# EAGLE board MovimientoC (EAGLE 7.6.0)
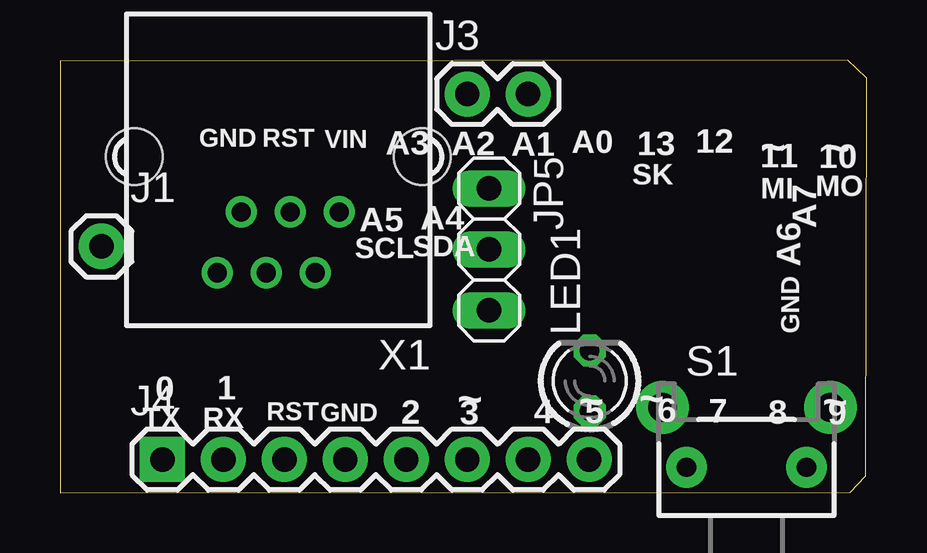
[diagram p0: board, top side]
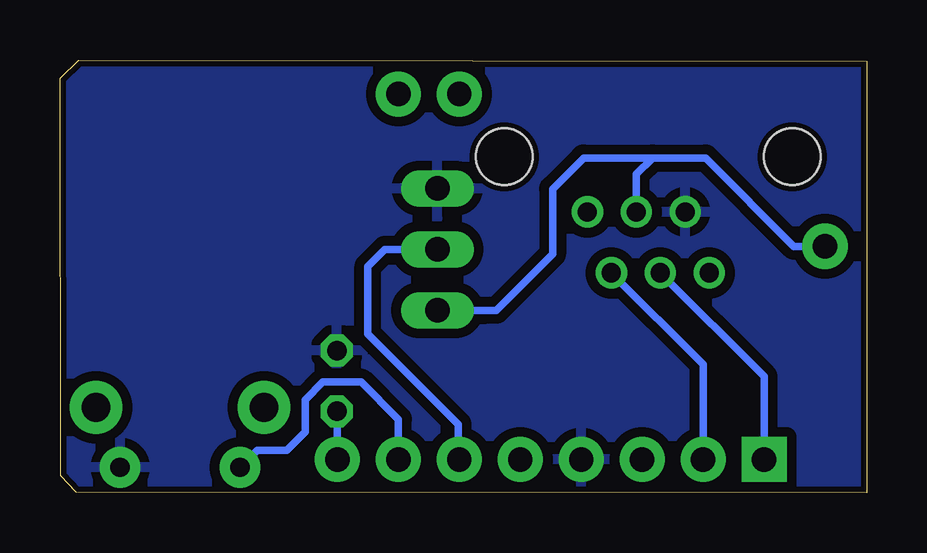
[diagram p1: board, bottom side, seen from below]

Size 33.6 x 18.06 mm. Coordinates in mm from the lower left corner, seen from the top.
Outline: 0,0 32.92,0.02 33.58,0.71 33.6,17.3 32.82,18.06 0,18.01 0,0
Copper layers (1*16): Top 0.035mm / dielectric 1.5mm / Bottom 0.035mm
Design rules "ITEADstudio_DRC *": minimum track width 6mil, minimum drill 12mil, track to track 16mil, track to pad 12mil, pad to pad 6mil, via to via 6mil, smd to smd 0mil, copper to edge 10mil, drill to drill 10mil, minimum pad ring 10mil, minimum via ring 6mil, stop-mask expansion 2mil, vias tented up to drill 100mil, thermal gap 15mil
Net classes: 1 power: width 0.381 mm, clearance 0.254 mm

## Footprints (pad centres in the part's own frame; a part is rotated, then mirrored left to right if it is on the bottom)
1X01 = drill 1.016 pad 1.88: 1 0,0
1X02 = drill 1.016 pad 1.88: 1 0,0; 2 2.54,0
1X08 = drill 1.016 pad 1.88 square: 1 0,0 | drill 1.016 pad 1.88: 2 2.54,0; 3 5.08,0; 4 7.62,0; 5 10.16,0; 6 12.7,0; 7 15.24,0; 8 17.78,0
1X03 = drill 1.016 long: 1 -2.54,0; 2 0,0; 3 2.54,0
LED3MM = drill 0.813 octagon: A -1.27,0; K 1.27,0
TACTILE-PTH-SIDEEZ = drill 0.8 pad 1.7: 1 -2.5,0; 2 2.5,0 | drill 1.2 pad 2.2: ANCHOR1 -3.5,2.5; ANCHOR2 3.5,2.5
YH-55-10 = drill 0.8 pad 1.3: 1 -2.54,2.3; 2 -1.54,4.84; 3 -0.5,2.3; 4 0.5,4.84; 5 1.54,2.3; 6 2.54,4.84 | hole 2.36: -6,0; 6,0

## Placement (x,y rotation side)
J1  [1X01]  1.73,10.29 0 top
J3  [1X02]  16.97,16.64 0 top
J4  [1X08]  4.27,1.4 0 top
JP5  [1X03]  17.88,10.16 270 top
LED1  [LED3MM]  22.07,4.67 90 top
S1  SWITCH-MOMENTARY-2SIDE_EZ  [TACTILE-PTH-SIDEEZ]  28.6,1.07 0 top
X1  YH-55-10  [YH-55-10]  9.09,14.02 180 top

## Library data of the parts
J1 J3 = SparkFun-Connectors
J4 = SparkFun-Connectors; PROD_ID: CONN-08438
JP5 = pinhead
LED1 = led
S1 = SparkFun-Electromechanical
X1 = con-wenzhou-yihua; OC_FARNELL: unknown; OC_NEWARK: unknown

## Nets
AGND [power]: JP5.1
GND [power]: J4.4 LED1.K S1.2 X1.5
N$1: J4.7 S1.1
N$3: J4.8 LED1.A
N$4: J1.1 JP5.3 X1.3
N$6: J4.2 X1.2
N$10: J4.6 JP5.2
VIN: J4.1 X1.4

## Tracks (layer width: path | path; a pad name or v marks a point on that pad's centre or on a via)
AGND
  pour Bottom: 4.65,17.81 33.35,17.88 33.55,0.15 0.2,0.2 0.18,17.83
GND
  pour Bottom: 0.08,17.88 33.43,17.88 33.5,0.15 0.15,0.15
N$1
  Bottom 0.305: J4.7 19.51,3.07 21.06,4.62 22.66,4.62 23.39,3.89 23.39,2.54 24.16,1.78 25.39,1.78 S1.1
N$3
  Bottom 0.305: J4.8 22.05,3.38 LED1.A
N$4
  Bottom 0.305: J1.1 3.02,10.29 6.71,13.97 8.91,13.97 | 15.85,7.62 JP5.3 15.42,7.62 13.08,9.96 13.08,12.68 11.79,13.97 8.91,13.97 | X1.3 9.59,13.29 8.91,13.97
N$6
  Bottom 0.305: J4.2 6.81,5.35 X1.2
N$10
  Bottom 0.305: JP5.2 20.07,10.16 20.78,9.45 20.78,6.63 17.02,2.87 17.02,1.45 J4.6
VIN
  Bottom 0.305: J4.1 4.27,4.85 X1.4

## Text on the board
_tsilk: VIN | A3 | A2 | A1 | 13 | 12 | ~ | GND | RST | A0 | 11 | 10 | ~ | A4 | SK | MI | A7 | MO | A5 | A6 | SCL | SDA | GND | 0 | 1 | 6 | TX | RX | RST | GND | 2 | ~ | 3 | 4 | ~ | 5 | ~ | 7 | 8 | ~ | 9